# Altium PCB mps_v1.PcbDoc
Units mil, origin at the board's own origin, x right, y up, seen from the top; angles counter-clockwise.
Board outline 3000 x 1495 mil, 2 copper layers (Top Layer, Bottom Layer); 4 components, 8 nets, 20 pads, 0 vias.
Unrouted connection lines stored in the file: 4.
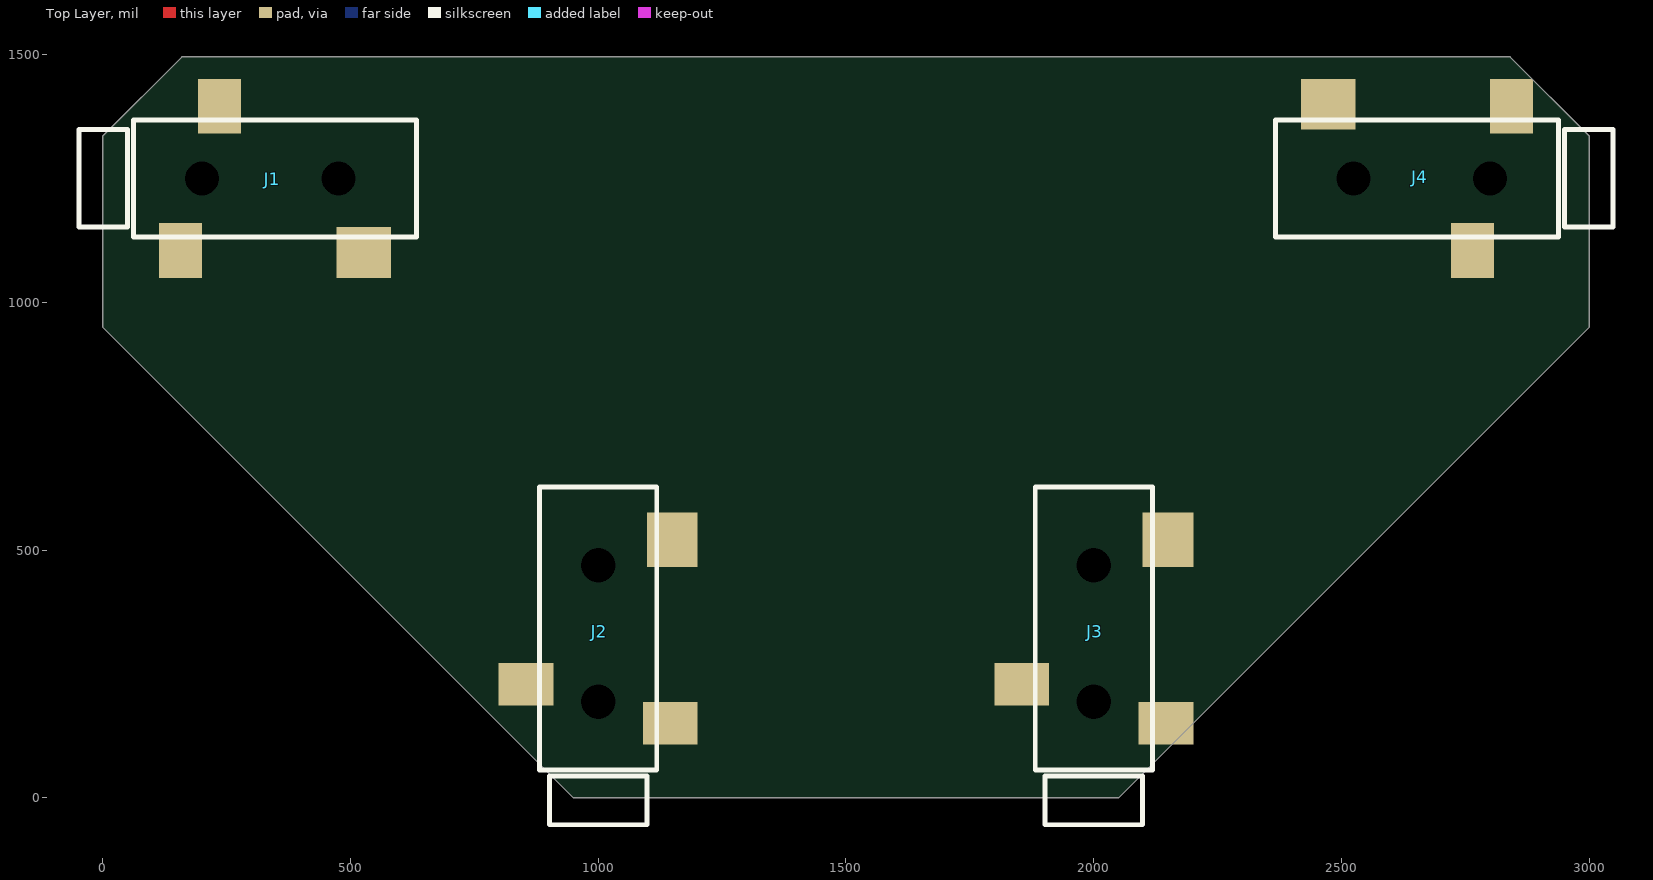
[diagram p0: Top Layer view]
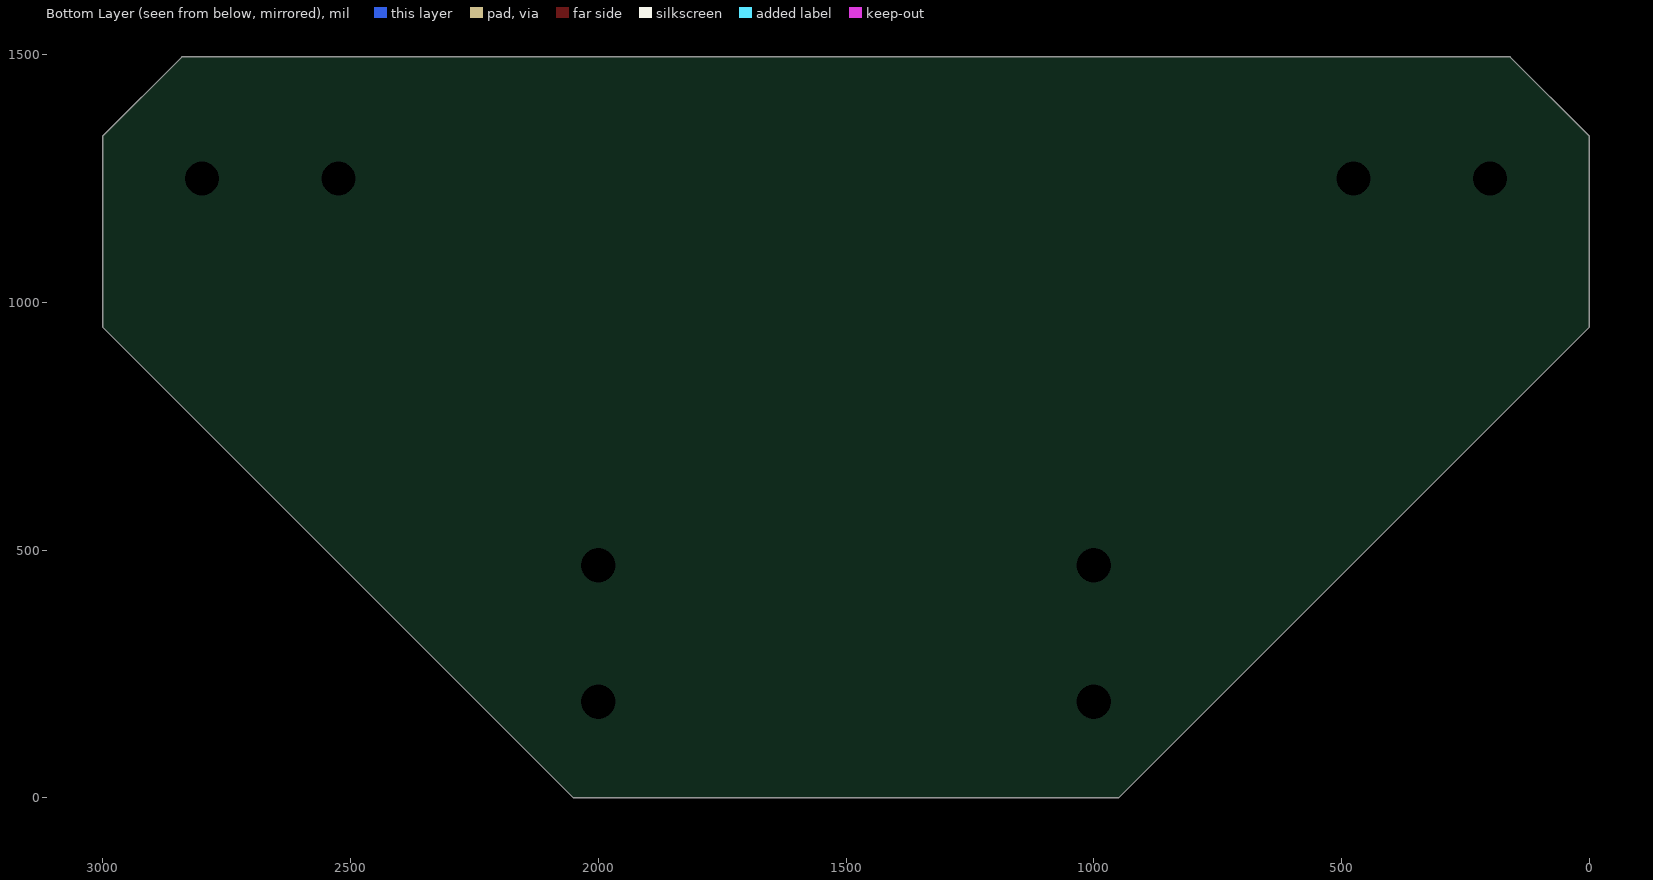
[diagram p1: Bottom Layer view, seen from below]

## Layer stack, top to bottom
Top Solder: solder mask 0.4, Solder Resist, Dk 3.5
Top Layer: signal copper 1.4
Dielectric 1: dielectric 12.6, FR-4, Dk 4.8
Bottom Layer: signal copper 1.4
Bottom Solder: solder mask 0.4, Solder Resist, Dk 3.5

## Board outline
0,950 0,1335 160,1495 2840,1495 3000,1335 3000,950 2050,0 950,0

## Design rules (kind name [scope] priority, off if disabled: settings)
Clearance [All] p1: gap=10 ignorepadtopadclearanceinfootprint=FALSE except(0: Arc-Hole Track-Hole SMDPad-Hole THPad-Hole Via-Hole Fill-Hole Poly-Hole Region-Hole Text-Hole)
PolygonConnect [All] p1: connectstyle=Relief reliefconductorwidth=10 reliefentries=4 polygonreliefangle="90 Angle" airgapwidth=10
RoutingVias [All] p1: holewidth=28 width=50 viastyle="Through Hole" minholewidth=28 minwidth=50 maxholewidth=28 maxwidth=50
SolderMaskExpansion [All] p1: expansion=4 istentingtop=FALSE
Width [All] p1: maxlimit=10 minlimit=10 preferedwidth=10
30 further rules are at their usual default settings.

## Components (designator, comment, footprint, x,y, rotation, side; value= is the part's Value field where it differs from the comment)
J1 "SJ-3523" SJ-352X 62.5,1250 r0 top
J2 "SJ-3523" SJ-352X 1000,56 r90 top
J3 "SJ-3523" SJ-352X 2000,56 r90 top
J4 "SJ-3523" SJ-352X 2937.5,1250 r180 top

## Footprints (in the part's own frame and the unit in brackets; to place one, negate y for a bottom-side part, rotate by r counter-clockwise, add the part's x,y. Pads: shape width x height; smd on the part's side, far side on the other; paste and mask are expansions set on the pad)
SJ-352X [mm]
  rect 2.2x2.8 smd: 1(2.4,-3.7) 3(4.4,3.7)
  rect 2.8x2.6 smd: 2(11.8,-3.8)
  round 0 hole 1.75 unplated: ""(3.5,0) ""(10.5,0)
  silkscreen extent -2.8,-3 14.5,3

## Nets (pads, with @x,y where several pads share a name; then routed paths per layer and width w, separated by ;. In a path a pad name is that pad's centre, name@x,y a point inside that pad or via, vN(x,y) a via of type N, cw(c..) or ccw(c..) an arc to the next point about the centre after c; other vN are vias at no path point)
SR1: J1.1 J1.3
SR2: J2.1 J2.3
SR3: J3.1 J3.3
SR4: J4.1 J4.3
T1: J1.2
T2: J2.2
T3: J3.2
T4: J4.2
pads on no net: J1. J2. J3. J4.

## Silkscreen, mask and mechanical layers (free items; w line width, h text height)
Mechanical 1:
  the board outline again, w10